# EAGLE board mySQM-ESP32-Master (EAGLE 9.6.2)
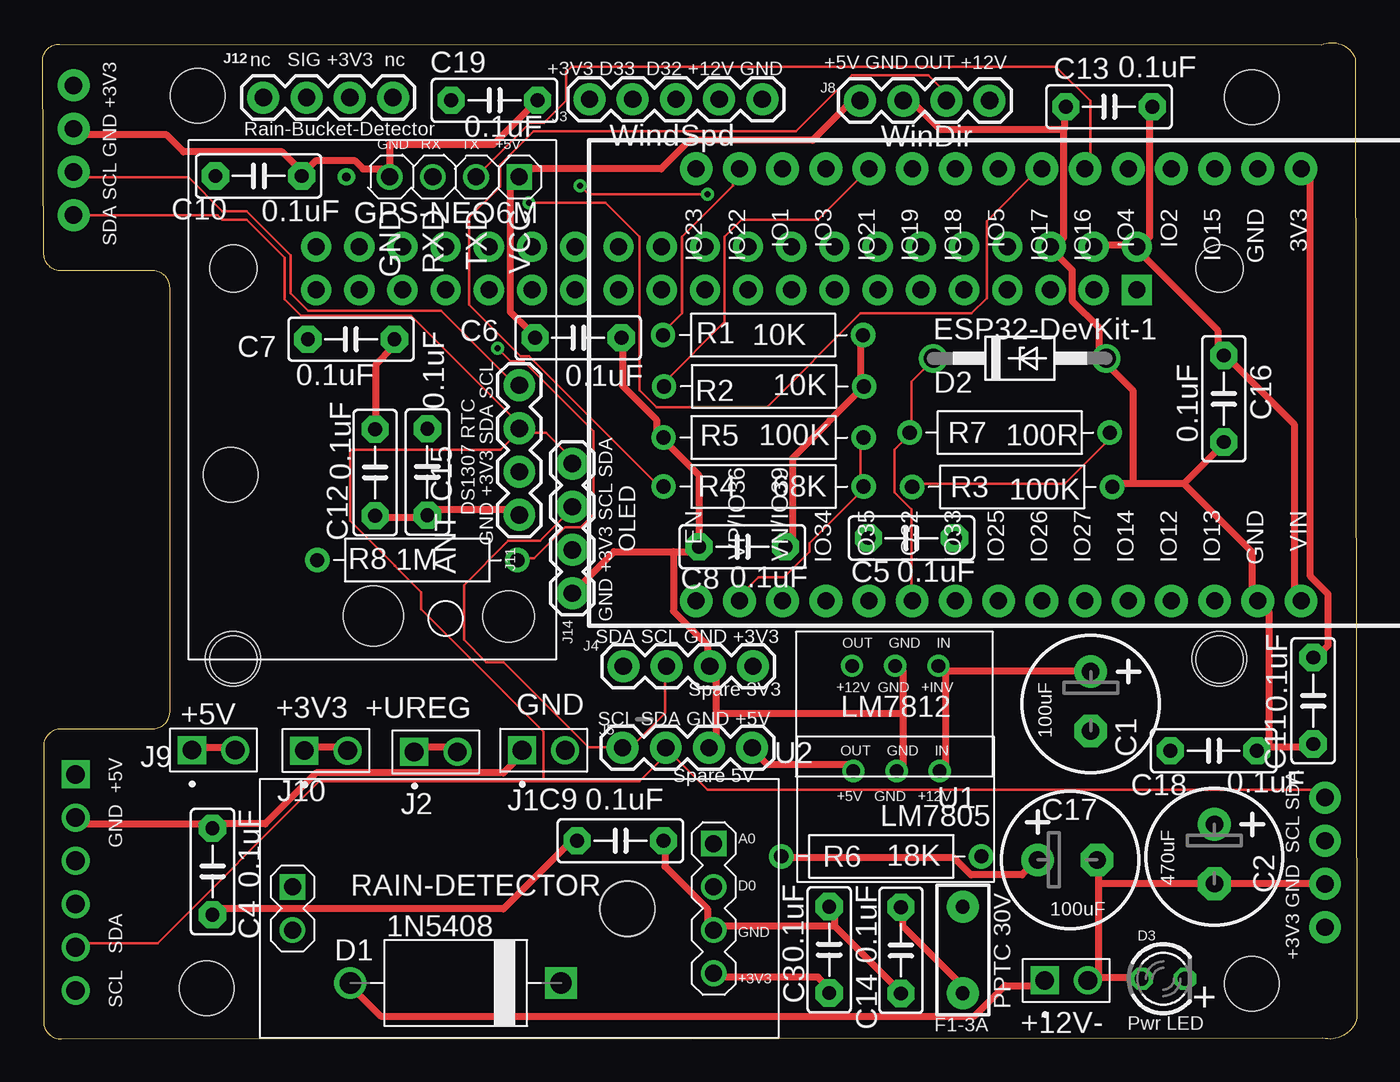
[diagram p0: board, top side]
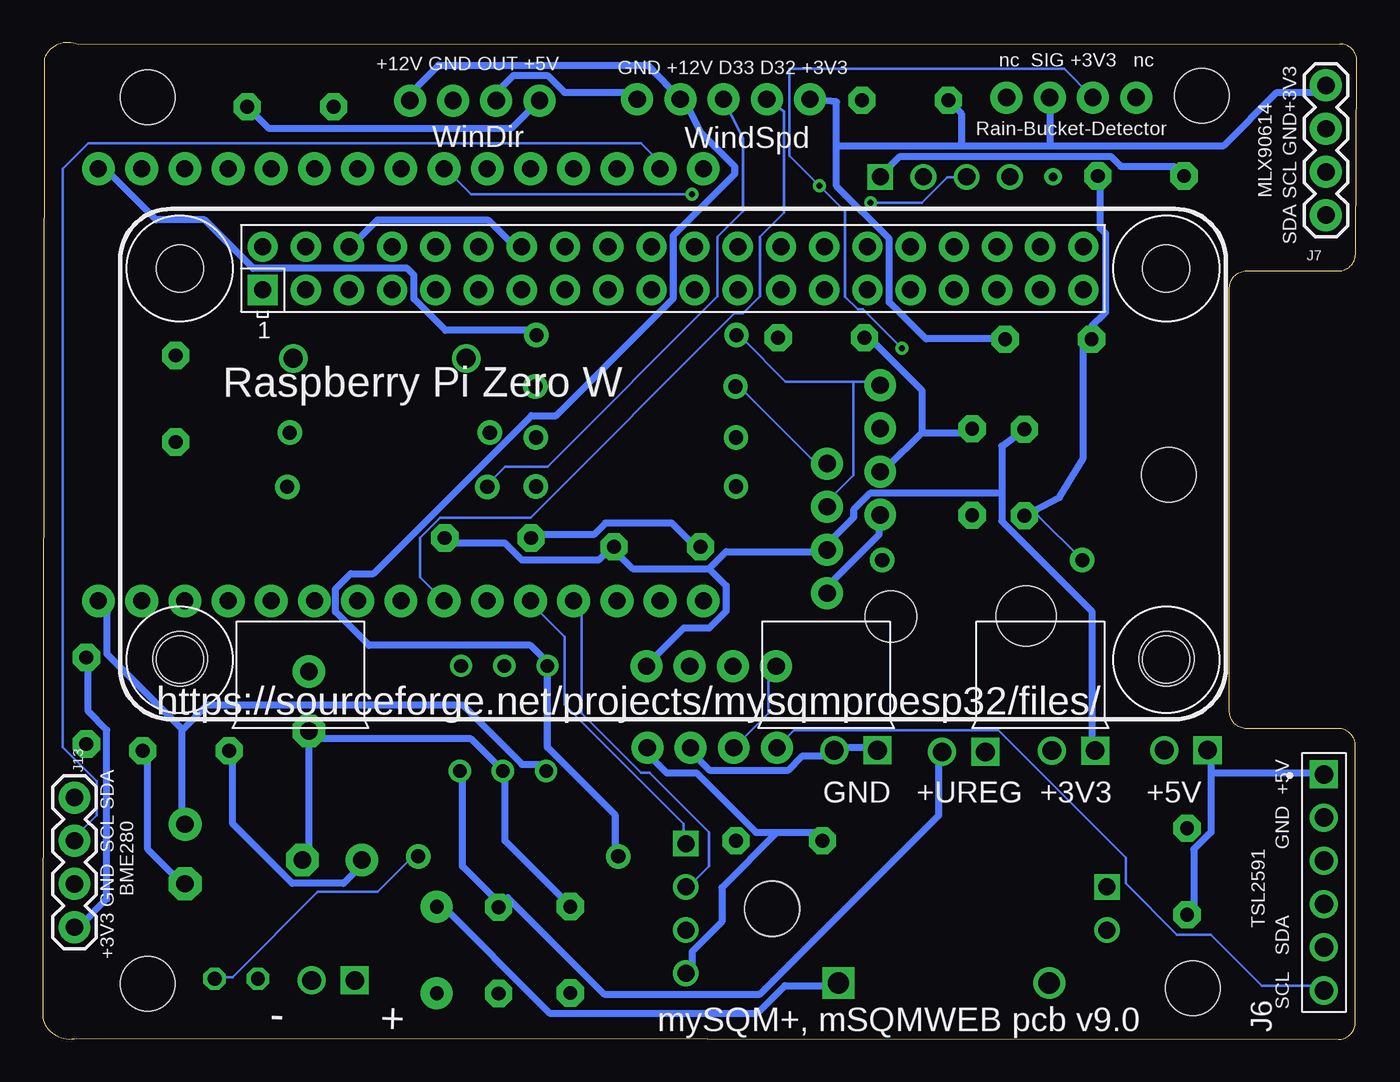
[diagram p1: board, bottom side, seen from below]

Size 77.28 x 58.58 mm. Coordinates in mm from the lower left corner, seen from the top.
Outline: 77.18,57.65 77.28,1.26 arc-90 75.27,0.07 1.09,0 arc-90 0.09,1 0.09,17.26 arc-90 1.09,18.26 6.49,18.26 arc90 7.49,19.26 7.49,44.16 arc90 6.49,45.16 1.09,45.16 arc-90 0.09,46.15 0,57.49 arc-90 1,58.5 75.17,58.46 arc-90 77.18,57.65
Copper layers (1*16): Top 0.035mm / dielectric 1.5mm / Bottom 0.035mm
Design rules "default": minimum track width 6mil, minimum drill 0.35mm, track to track 6mil, track to pad 6mil, pad to pad 6mil, via to via 6mil, smd to smd 6mil, copper to edge 40mil, drill to drill 6mil, minimum pad ring 10mil, minimum via ring 8mil, stop-mask expansion 4mil, vias tented up to drill 0mil, thermal gap 10mil
Holes 3.2 mm at 71.09,55.36 69.19,22.36 71.09,3.26 34.39,7.66 11.19,22.36 9.11,55.46 9.65,3 11.06,33.19

## Footprints (pad centres in the part's own frame; a part is rotated, then mirrored left to right if it is on the bottom)
61300211121 = drill 1.1 square: 1 -1.27,0 | drill 1.1: 2 1.27,0
E-035X080 = drill 1.016 pad 1.93: + -1.905,0 | drill 1.016 pad 1.93 octagon: - 1.587,0
C5B2.5 = drill 0.813 pad 1.6 octagon: 1 -2.54,0; 2 2.54,0
DO201AD = drill 1.25: A 6.2,0 | drill 1.25 square: C -6.2,0
DO41Z10 = drill 1.118: A 5.08,0; C -5.08,0
LED3MM = drill 0.813 octagon: A 1.27,0; K -1.27,0
PTH = drill 0.8 pad 1.88: P$1 -2.54,0; P$2 2.54,0
GPS-RECEIVER-NEO6M = drill 1 square: 1 -15.875,7.366 | drill 1: 2 -15.875,4.826; 3 -15.875,2.286; 4 -15.875,-0.254 | drill 0.5 pad 0.254: 5 -15.875,-2.794 | hole 3: 9.954,6.731 | hole 3.5: 9.927,-1.214
1X05 = drill 1.016 pad 1.88: 1 0,0; 2 2.54,0; 3 5.08,0; 4 7.62,0; 5 10.16,0
1X04 = drill 1.016 pad 1.88: 1 0,0; 2 2.54,0; 3 5.08,0; 4 7.62,0
61300611121 = drill 1.1 square: 1 -6.35,0 | drill 1.1: 2 -3.81,0; 3 -1.27,0; 4 1.27,0; 5 3.81,0; 6 6.35,0
RESAD1176W63L850D250B = drill 0.83 pad 1.43: 1 -5.88,0; 2 5.88,0
SOIL-MOISTURE-SENSOR = drill 1 square: J1.1 -11.43,-3.81; J2.1 13.335,-1.27 | drill 1: J1.2 -11.43,-1.27; J1.3 -11.43,1.27; J1.4 -11.43,3.81; J2.2 13.335,1.27 | hole 3.2: -6.35,0
DC-DC_CONVERTER_78XX = drill 0.8: GND 0,0; VIN -2.54,0; VOUT 2.54,0
RASPBERRYPI_BASTELSTUBE_V13_RASPI_BOARD_B+_FULL = drill 1 pad 1.778 square: 1 8.37,25.23 | drill 1 pad 1.778: 2 8.37,27.77; 3 10.91,25.23; 4 10.91,27.77; 5 13.45,25.23; 6 13.45,27.77; 7 15.99,25.23; 8 15.99,27.77; 9 18.53,25.23; 10 18.53,27.77; 11 21.07,25.23; 12 21.07,27.77; 13 23.61,25.23; 14 23.61,27.77; 15 26.15,25.23; 16 26.15,27.77; 17 28.69,25.23; 18 28.69,27.77; 19 31.23,25.23; 20 31.23,27.77; 21 33.77,25.23; 22 33.77,27.77; 23 36.31,25.23; 24 36.31,27.77; 25 38.85,25.23; 26 38.85,27.77; 27 41.39,25.23; 28 41.39,27.77; 29 43.93,25.23; 30 43.93,27.77; 31 46.47,25.23; 32 46.47,27.77; 33 49.01,25.23; 34 49.01,27.77; 35 51.55,25.23; 36 51.55,27.77; 37 54.09,25.23; 38 54.09,27.77; 39 56.63,25.23; 40 56.63,27.77 | hole 2.75: 3.5,3.5; 3.5,26.5; 61.5,3.5; 61.5,26.5
ESP32-DEVKITV1 = drill 1 pad 1.93: 3V3 -16.52,-12.27; D1 13.96,-12.27; D2 -8.9,-12.27; D3 11.42,-12.27; D4 -6.36,-12.27; D5 1.26,-12.27; D12 -8.9,13.135; D13 -11.44,13.135; D14 -6.36,13.135; D15 -11.44,-12.27; D16 -3.82,-12.27; D17 -1.28,-12.27; D18 3.8,-12.27; D19 6.34,-12.27; D21 8.88,-12.27; D22 16.5,-12.27; D23 19.04,-12.27; D25 1.26,13.135; D26 -1.28,13.135; D27 -3.82,13.135; D32 6.34,13.135; D33 3.8,13.135; D34 11.42,13.135; D35 8.88,13.135; D36 16.5,13.135; D39 13.96,13.135; EN 19.04,13.135; GND@1 -13.98,13.135; GND@2 -13.98,-12.27; VIN -16.52,13.135

## Placement (x,y rotation side)
+12V-  +12V POWER  [61300211121]  60.19,3.46 0 top
C1  100uF  [E-035X080]  61.62,19.71 270 top
C2  470uF  [E-035X080]  68.9,10.73 270 top
C3  0.1uF  [C5B2.5]  46.25,5.26 90 top
C4  0.1uF  [C5B2.5]  9.99,9.86 90 top
C5  0.1uF  [C5B2.5]  51.09,29.46 180 top
C6  0.1uF  [C5B2.5]  31.49,41.23 0 top
C7  0.1uF  [C5B2.5]  18.14,41.15 180 top
C8  0.1uF  [C5B2.5]  41.14,28.95 0 top
C9  0.1uF  [C5B2.5]  33.97,11.67 0 top
C10  0.1uF  [C5B2.5]  12.7,50.74 0 top
C11  0.1uF  [C5B2.5]  74.7,19.9 270 top
C12  0.1uF  [C5B2.5]  19.56,33.31 90 top
C13  0.1uF  [C5B2.5]  62.7,54.81 0 top
C14  0.1uF  [C5B2.5]  50.47,5.23 270 top
C15  0.1uF  [C5B2.5]  22.62,33.34 90 top
C16  0.1uF  [C5B2.5]  69.45,37.65 270 top
C17  100uF  [E-035X080]  60.41,10.54 0 top
C18  0.1uF  [C5B2.5]  68.85,16.96 0 top
C19  0.1uF  [C5B2.5]  26.57,55.19 0 top
D1  1N5408  [DO201AD]  24.29,3.31 180 top
D2  1N4728 3V3  [DO41Z10]  57.45,40.02 0 top
D3  Pwr LED  [LED3MM]  65.89,3.56 0 top
F1-3A  PPTC 30V  [PTH]  54.1,5.25 270 top
GPS-NEO6M  GPS-RECEIVER-NEO6M  [GPS-RECEIVER-NEO6M]  20.66,34.81 270 top
J1  GND  [61300211121]  29.46,16.99 0 top
J2  +12V  [61300211121]  23.12,16.89 0 top
J3  WindSpd  [1X05]  32.16,55.25 0 top
J4  Spare 3V3  [1X04]  34.15,21.92 0 top
J5  Spare 5V  [1X04]  34.1,17.13 0 top
J6  TSL2591  [61300611121]  1.94,9.22 270 bottom
J7  MLX90614  [1X04]  1.82,48.44 90 bottom
J8  WinDir  [1X04]  48.06,55.17 0 top
J9  +5V  [61300211121]  10.05,17 0 top
J10  +3V3  [61300211121]  16.66,16.97 0 top
J11  DS1307 RTC  [1X04]  28.03,38.44 270 top
J12  Rain-Bucket-Detector  [1X04]  12.98,55.35 0 top
J13  BME280  [1X04]  75.4,14.21 270 bottom
J14  OLED  [1X04]  31.15,26.22 90 top
R1  10K  [RESAD1176W63L850D250B]  42.36,41.39 180 top
R2  10K  [RESAD1176W63L850D250B]  42.42,38.37 180 top
R3  100K  [RESAD1176W63L850D250B]  57.01,32.47 0 top
R4  68K  [RESAD1176W63L850D250B]  42.39,32.49 180 top
R5  100K  [RESAD1176W63L850D250B]  42.39,35.37 0 top
R6  18K  [RESAD1176W63L850D250B]  49.31,10.75 0 top
R7  100R  [RESAD1176W63L850D250B]  56.86,35.66 0 top
R8  1M  [RESAD1176W63L850D250B]  22.04,28.16 0 top
RAIN-DETECTOR  [SOIL-MOISTURE-SENSOR]  28.03,7.69 180 top
U1  LM7812  [DC-DC_CONVERTER_78XX]  50.13,21.95 180 top
U2  LM7805  [DC-DC_CONVERTER_78XX]  50.21,15.77 180 top
U$1  RPI-ZERO  [RASPBERRYPI_BASTELSTUBE_V13_RASPI_BOARD_B+_FULL]  72.71,18.81 0 bottom
U$3  ESP32DEVKITV1  [ESP32-DEVKITV1]  57.47,38.9 180 top

## Library data of the parts
+12V- J1 J2 J9 J10 = Headers; CREATED_BY: PCBLayout.com; DIGI_KEY_PART_NUMBER: 732-5315-ND; MANUFACTURER: Wurth Electronics Inc.; MPN: 61300211121
C1 C2 C17 = cap-master
C3-C16 C18 C19 = capacitor-wima
D1 = 1N5408; CREATED_BY: PCBLayout.com; DIGIKEY_PART_NUMBER: MBR360GOS-ND; MANUFACTURER: ON Semiconductor; MPN: MBR360G; PACKAGE: DO-201AD
D2 = diode
D3 = led; MF: VISHAY SEMICONDUCTOR; OC_FARNELL: 1612435
F1-3A = SparkFun-Fuses; PROD_ID: RES-08490
GPS-NEO6M RAIN-DETECTOR = diy-modules
J3 = SparkFun-Connectors
J4 J5 J7 J8 J11-J14 = SparkFun-Connectors; PROD_ID: CONN-09696
J6 = Headers; CREATED_BY: PCBLayout.com; DIGI_KEY_PART_NUMBER: 732-5319-ND; MANUFACTURER: Wurth Electronics Inc.; MPN: 61300611121
R1-R8 = Resistor; CATEGORY: Resistor; SUB-CATEGORY: Fixed
U1 U2 = SparkFun-IC-Power; PROD_ID: COM-13655
U$1 = RPI-Zero
U$3 = ESP32-DEVKITV1

## Nets
2: J3.3 R3.1 R7.2
+3V3: C5.1 C7.1 C8.2 C11.1 C12.2 C19.1 J3.1 J4.4 J7.4 J10.1 J10.2 J12.3 J13.4 J14.2 R1.1 R2.1 U$3.3V3
+5V: C2.+ C3.1 C4.1 C6.1 C9.1 C10.1 C13.2 C15.2 C16.1 GPS-NEO6M.1 J5.4 J6.1 J8.1 J9.1 J9.2 J11.3 RAIN-DETECTOR.J1.4 U2.VOUT U$1.2 U$1.4 U$3.VIN
+12V: C17.+ C18.1 J3.4 J8.4 R6.1 U1.VOUT
+INPUT-FUSED: C1.+ C14.1 F1-3A.P$2 J2.1 J2.2 U1.VIN U2.VIN
A0: RAIN-DETECTOR.J1.1 U$3.D35
D0: RAIN-DETECTOR.J1.2 U$3.D34
D18: J12.2 R8.2 U$3.D18
D32: D2.C R7.1 U$3.D32
D33: J3.2 U$3.D33
GND: +12V-.2 C1.- C2.- C3.2 C4.2 C5.2 C6.2 C7.2 C8.1 C9.2 C10.2 C11.2 C12.1 C13.1 C14.2 C15.1 C16.2 C17.- C18.2 C19.2 D2.A D3.K GPS-NEO6M.4 J1.1 J1.2 J3.5 J4.3 J5.3 J6.2 J7.3 J8.2 J11.4 J13.3 J14.1 R3.2 R5.1 R8.1 RAIN-DETECTOR.J1.3 U1.GND U2.GND U$1.6 U$1.14 U$3.GND@1
N$1: D3.A R6.2
N$2: J12.4
N$3: J8.3 R4.2
RX2: GPS-NEO6M.2 U$3.D16
SCL: J4.2 J5.1 J6.6 J7.2 J11.1 J13.2 J14.3 R1.2 U$3.D22
SDA: J4.1 J5.2 J6.5 J7.1 J11.2 J13.1 J14.4 R2.2 U$3.D21
TX2: GPS-NEO6M.3 U$3.D17
V-IN+: +12V-.1 D1.A
V-IN-D+: D1.C F1-3A.P$1
VP: R4.1 R5.2 U$3.D36

## Tracks (layer width: path | path; a pad name or v marks a point on that pad's centre or on a via)
2
  Top 0.152: R3.1 51.59,32.66 60.09,32.66 62.59,35.16 R7.2
  Bottom 0.152: J3.3 36.09,52.96 36.09,48.66 37.59,47.16 37.59,43.66 47.59,33.66 50.09,33.66 51.09,32.66 R3.1
+3V3
  Top 0.4: U$3.3V3 74.54,51.11 74.54,27.21 75.59,26.16 75.59,23.16 75.09,22.66 C11.1 | R1.1 48.09,41.16 48.09,38.66 R2.1 44.09,34.16 44.09,29.16 C8.2 | J10.1 15.59,17.16 17.59,17.16 J10.2 | C12.2 19.59,35.89 19.59,39.66 20.59,40.66 C7.1
  Bottom 0.152: 23.26,52.7 23.43,52.53
  Bottom 0.4: C11.1 74.59,22.16 74.59,19.27 73.49,18.17 73.49,8.26 75.09,6.66 J13.4 | C5.1 53.59,29.16 50.09,29.16 49.09,28.16 44.59,28.16 44.09,28.66 C8.2 43.59,28.66 42.59,27.66 38.09,27.66 | 38.09,27.66 37.09,28.66 31.59,28.66 J14.2 31.09,29.16 29.59,30.66 29.59,31.12 28.62,32.09 20.89,32.09 | 38.09,27.66 37.09,26.66 37.09,25.16 38.09,24.16 39.59,24.16 41.59,22.16 J4.4 | 30.59,52.53 30.59,50.15 27.49,47.04 27.49,43.31 25.34,41.16 21.09,41.16 C7.1 | 30.59,52.53 30.59,55.09 J3.1 | 30.59,52.53 23.43,52.53 18.06,52.53 | 18.06,52.53 7.84,52.53 4.71,55.66 2.09,55.66 J7.4 | 20.89,32.09 20.89,34.86 C12.2 | 20.89,32.09 20.89,30.45 15.59,25.16 15.59,17.16 J10.1 | U$3.3V3 73.59,51.16 70.59,48.16 67.76,48.16 64.9,45.3 55.84,45.3 55.44,44.91 55.44,43.51 53.59,41.66 48.59,41.66 R1.1 | J12.3 18.06,52.53 | C19.1 23.26,54.42 23.26,52.7
+5V
  Top 0.4: J9.2 11.09,17.16 9.09,17.16 J9.1 | RAIN-DETECTOR.J1.4 39.59,3.66 45.59,3.66 46.09,3.16 C3.1 | U2.VOUT 47.59,16.16 42.59,16.16 42.09,16.66 J5.4 | C4.1 10.09,7.66 27.09,7.66 31.09,11.66 C9.1 | C6.1 28.59,41.66 27.51,42.74 27.51,50.65 GPS-NEO6M.1 28.09,51.16 36.37,51.16 38.04,52.84 45.27,52.84 47.59,55.16 J8.1 | C13.2 65.09,54.66 65.09,47.16 64.59,46.66 U$1.2 | U$1.2 64.59,46.16 69.09,41.66 69.09,40.66 C16.1 69.59,40.16 73.59,36.16 73.59,26.16 U$3.VIN | U$1.4 62.09,46.66 64.09,46.66 U$1.2
  Bottom 0.4: 8.59,15.66 8.59,16.66 J9.1 | 8.59,15.66 8.59,12.16 9.59,11.16 9.59,7.66 C4.1 | 8.59,15.66 2.09,15.66 J6.1 | 34.09,12.16 35.35,12.16 38.85,15.66 40.59,15.66 41.59,16.66 J5.4 | 34.09,12.16 31.59,12.16 C9.1 | 34.09,12.16 37.34,8.91 37.34,6.91 39.09,5.16 39.09,4.16 RAIN-DETECTOR.J1.4 | 25.59,35.66 22.63,35.66 C15.2 | 25.59,35.66 27.59,33.66 J11.3 | C10.1 10.75,51.31 13.89,51.31 14.48,51.89 26.86,51.89 27.59,51.16 GPS-NEO6M.1 | 25.59,35.66 25.59,38.16 28.59,41.16 C6.1 | 69.05,18.21 73.5,22.66 73.5,25.63 U$3.VIN | C2.+ 69.09,12.66 69.09,18.16 69.05,18.21 | C13.2 63.99,53.56 49.69,53.56 48.09,55.16 J8.1 | 69.05,18.21 67.59,19.66 52.59,19.66 49.09,16.16 48.09,16.16 U2.VOUT
+12V
  Top 0.4: R6.1 43.59,10.66 53.59,10.66 54.59,9.66 57.59,9.66 58.09,10.16 C17.+
  Bottom 0.4: J8.4 55.59,55.66 54,57.25 41.7,57.25 J3.4 39.35,54.82 38.59,53.3 36.58,51.29 36.58,50.86 40.2,47.24 40.2,43.56 47.09,36.66 48.53,36.66 57.82,27.37 59.15,27.37 60.05,26.47 60.05,25.12 58.09,23.16 48.59,23.16 47.59,22.16 U1.VOUT 47.59,17.16 43.59,13.16 43.59,11.16 R6.1 | C18.1 66.09,16.66 66.09,12.66 62.59,9.16 59.59,9.16 58.59,10.16 C17.+
+INPUT-FUSED
  Top 0.4: 53.09,21.66 53.09,16.16 U2.VIN | 53.09,21.66 61.59,21.66 C1.+ | 53.09,21.66 U1.VIN | J2.1 22.09,17.16 24.09,17.16 J2.2 | C14.1 50.59,7.66 50.59,6.66 54.09,3.16 F1-3A.P$2
  Bottom 0.4: J2.2 24.59,16.66 24.59,13.16 35.09,2.66 44.27,2.66 49.93,8.32 C14.1 50.59,8.16 52.59,10.16 52.59,15.66 U2.VIN
A0
  Bottom 0.152: RAIN-DETECTOR.J1.1 39.59,11.66 39.59,12.66 46.59,19.66 46.59,23.66 48.59,25.66 U$3.D35
D0
  Bottom 0.152: RAIN-DETECTOR.J1.2 39.09,9.16 38.09,10.16 38.09,12.16 41.59,15.66 42.09,15.66 45.59,19.16 45.59,25.66 U$3.D34
D18  (via drill 0.35)
  Top 0.152: v26.76,40.61 27.52,39.84 28.29,39.84 32.4,35.73 32.4,30.85 31.64,30.09 30.72,30.09 28.9,28.26 27.98,28.26 R8.2 | v39.09,49.66 32.09,49.66 v31.59,50.16 31.59,50.2
  Bottom 0.152: v26.76,40.61 29.05,42.89 29.35,42.89 30.12,43.65 30.12,48.66 30.09,48.66 v31.59,50.16 33.35,51.92 33.35,57.04 17.22,57.04 J12.2 | v39.09,49.66 52.09,49.66 53.59,51.16 U$3.D18
D32
  Top 0.152: D2.C 52.09,39.66 51.09,38.66 51.09,35.66 R7.1 50.59,35.16 50.09,34.66 50.09,32.16 51.09,31.16 51.09,26.16 U$3.D32
D33
  Bottom 0.152: J3.2 34.59,55.14 33.68,54.53 33.68,48.59 35.09,47.17 35.09,43.66 36.09,42.66 36.59,42.66 48.59,30.66 53.91,30.66 55.09,29.48 55.09,27.16 54.09,26.16 U$3.D33
GND
  Top 0.152: GPS-NEO6M.4
  Top 0.4: 72.09,17.16 74.59,17.16 C11.2 | 72.09,17.16 71.59,17.16 C18.2 72.09,17.16 | J13.3 75.09,9.16 69.09,9.16 C2.- 68.59,9.16 62.09,9.16 | 62.09,3.66 61.59,3.66 +12V-.2 62.09,3.66 | 62.09,3.66 64.59,3.66 D3.K | 62.09,3.66 62.09,9.16 | 62.09,9.16 62.09,10.16 C17.- | 67.09,32.66 64.09,32.66 | 64.09,32.66 63.09,32.66 R3.2 | 67.09,32.66 69.09,34.66 C16.2 | 67.09,32.66 71.09,28.66 71.09,26.16 U$3.GND@1 71.59,25.66 72.09,25.16 72.09,17.16 | 60.04,53.46 60.04,47.11 59.59,46.66 U$1.6 59.59,46.16 60.53,45.22 60.53,43.41 62.09,41.85 62.09,40.16 D2.A 62.59,39.66 64.09,38.16 64.09,32.66 | C13.1 60.09,54.66 60.09,53.66 60.07,53.66 60.07,53.46 60.04,53.46 | 60.04,53.46 52.79,53.46 51.09,55.16 J8.2 | C9.2 36.59,11.66 36.59,10.16 39.09,7.66 39.09,6.66 RAIN-DETECTOR.J1.3 39.59,6.66 46.59,6.66 | 50.59,19.16 50.59,21.66 U1.GND | 50.59,19.16 50.59,16.16 U2.GND | 46.59,6.66 46.59,7.66 C3.2 | 46.59,6.66 50.09,3.16 C14.2 | J6.2 2.09,12.66 9.59,12.66 C4.2 10.09,12.66 13.09,12.66 16.09,15.66 27.09,15.66 28.09,16.66 J1.1 | 39.59,19.16 39.59,21.66 J4.3 39.09,22.16 39.09,23.16 37.09,25.16 37.09,28.66 | 39.59,19.16 39.59,17.16 J5.3 | 39.59,19.16 50.59,19.16 | C6.2 34.09,41.16 34.09,38.41 36.09,36.41 36.09,35.66 R5.1 36.59,35.16 38.59,33.16 38.59,29.16 C8.1 38.59,28.66 37.09,28.66 | GPS-NEO6M.4 20.09,51.16 18.84,51.16 18.34,51.66 16.09,51.66 15.59,51.16 C10.2 15.09,51.16 14.09,52.16 8.3,52.16 7.3,53.16 2.09,53.16 J7.3 | C12.1 19.8,30.66 22.35,30.66 C15.1 22.64,31.16 27.59,31.16 J11.4 | 37.09,28.66 33.59,28.66 J14.1 | C19.2 26.5,52.57 20.4,52.57 GPS-NEO6M.4
  Bottom 0.152: R8.1 16.25,28.26 18.74,30.75 C12.1
  Bottom 0.4: C18.2 71.09,16.66 71.09,11.16 69.09,9.16 C2.- | 61.59,17.66 61.59,10.66 C17.- | U$1.14 49.59,46.66 51.09,48.16 57.59,48.16 59.09,46.66 U$1.6 | J3.5 42.71,55.66 46.59,55.66 47.59,56.66 49.59,56.66 50.59,55.66 J8.2 | C3.2 46.59,8.16 50.09,11.66 50.09,15.66 U2.GND 50.59,16.16 52.09,17.66 61.59,17.66 | J1.1 28.59,17.16 30.59,17.16 J1.2 31.09,16.66 32.59,16.66 33.44,15.81 38.08,15.81 39.13,16.87 J5.3 | C5.2 48.09,29.66 44.87,29.66 44.19,30.34 40.27,30.34 39.09,29.16 C8.1 | C12.1 17.49,31.85 16.09,34.16 16.09,40.66 C7.2 15.6,41.89 14.78,42.72 14.78,47.34 15.09,47.66 15.09,50.66 C10.2 | J14.1 31.09,26.66 28.09,29.66 28.09,30.66 J11.4 | 61.59,17.66 C1.-
N$1
  Bottom 0.152: D3.A 67.09,3.66 66.09,3.66 61.09,8.66 57.59,8.66 55.59,10.66 R6.2
N$3
  Top 0.152: R4.2 36.09,32.66 28.59,40.16 28.09,40.16 25.09,43.16 25.09,48.3 26.9,50.11 26.9,51.4 28.86,53.37 44.3,53.37 47.59,56.66 52.09,56.66 53.09,55.66 J8.3
RX2
  Top 0.152: GPS-NEO6M.2 28.67,53.87 29.49,53.87 30.79,55.17 30.79,56.86 31.09,57.16 59.59,57.16 61.59,55.16 61.59,51.66 U$3.D16
SCL
  Top 0.152: J4.2 36.59,21.66 36.59,19.16 34.59,17.16 J5.1 34.09,17.16 32.09,17.16 27.09,22.16 26.09,22.16 24.77,23.48 24.77,26.69 27.38,29.31 29.24,29.31 31.09,31.16 J14.3 | J7.2 2.09,50.66 8.59,50.66 10.58,48.68 11.99,48.68 14.59,46.07 14.59,43.84 15.61,42.82 23.43,42.82 27.59,38.66 J11.1 | U$3.D22 40.59,51.16 40.59,50.16 37.59,47.16 37.59,42.66 36.59,41.66 R1.2
  Bottom 0.152: J13.2 75.09,12.16 74.09,13.16 74.09,15.16 76.09,17.16 76.09,51.16 74.59,52.66 42.09,52.66 41.09,51.66 U$3.D22 | J6.6 2.09,3.16 5.59,3.16 8.59,6.16 10.59,6.16 13.59,9.16 13.59,10.66 21.09,18.16 33.09,18.16 34.09,17.16 J5.1 | 29.59,38.66 28.09,38.66 J11.1 | 29.59,38.66 33.59,38.66 36.09,41.16 R1.2 | 29.59,38.66 29.59,33.16 31.09,31.66 J14.3
SDA
  Top 0.152: 28.06,35.79 28.09,35.66 29.59,35.66 31.09,34.16 J14.4 | 28.06,35.79 J11.2 28.03,36.15 | J7.1 10.3,48.44 10.57,48.17 11.99,48.17 14.23,45.94 14.23,43.49 15.19,42.52 21.66,42.52 28.03,36.15 | U$3.D21 45.59,48.16 41.09,48.16 40.09,47.16 40.09,42.16 36.59,38.66 R2.2 | 29.45,15.16 35.09,15.16 36.59,16.66 J5.2 37.09,16.66 39.09,14.66 75.09,14.66 J13.1 | 29.45,15.16 16.28,15.16 6.78,5.66 2.09,5.66 J6.5 | 29.45,15.16 29.45,18.09 22.27,25.27 22.27,26.27 20.7,27.84 20.74,27.84 18.09,30.48 18.09,34.66 26.93,34.66 28.06,35.79 | 28.03,36.15 28.03,36.56
  Bottom 0.152: R2.2 36.09,38.16 31.59,33.66 J14.4 | J4.1 34.59,21.66 34.59,19.16 36.59,17.16 J5.2
TX2  (via drill 0.35)
  Top 0.152: v28.59,49.16 33.09,49.16 35.09,47.16 35.09,38.16 36.09,37.16 42.59,37.16 48.09,42.66 54.62,42.66 55.52,43.56 55.52,48.08 58.59,51.16 U$3.D17
  Bottom 0.152: v28.59,49.16 25.59,49.16 24.09,50.66 23.09,50.66 GPS-NEO6M.3
V-IN+
  Top 0.4: +12V-.1 58.59,3.16 56.59,3.16 54.8,1.37 19.88,1.37 18.09,3.16 D1.A
V-IN-D+
  Bottom 0.4: D1.C 30.59,3.16 33.64,3.16 35.26,1.54 47.47,1.54 54.09,8.16 F1-3A.P$1
VP
  Top 0.152: R5.2 48.09,35.16 48.09,32.66 R4.1 48.09,32.16 45.09,29.16 45.09,28.66 43.59,27.16 42.09,27.16 41.09,26.16 U$3.D36

## Text on the board
tNames: +5V GND OUT +12V | SDA SCL GND +3V3 | nc SIG +3V3 nc | +3V3 D33 D32 +12V GND | GND RX TX +5V | ESP32-DevKit-1 | GND +3V3 SDA SCL | GND +3V3 SCL SDA | SDA SCL GND +3V3 | OUT GND IN | +12V GND +INV | +UREG | SCL SDA GND +5V | OUT GND IN | +5V GND +12V | +3V3 GND SCL SDA | A0 / / / D0 / / / GND / / / +3V3 | SCL SDA GND +5V | +
bNames: +12V GND OUT +5V | SDA SCL GND+3V3 | nc SIG +3V3 nc | GND +12V D33 D32 +3V3 | Rain-Bucket-Detector | WindSpd | WinDir | Raspberry Pi Zero W | https://sourceforge.net/projects/mysqmproesp32/files/ | GND +UREG +3V3 +5V | +3V3 GND SCL SDA | SCL SDA GND +5V | mySQM+, mSQMWEB pcb v9.0 | - +